# EAGLE board alcoholdetection v1 (EAGLE 9.7.0)
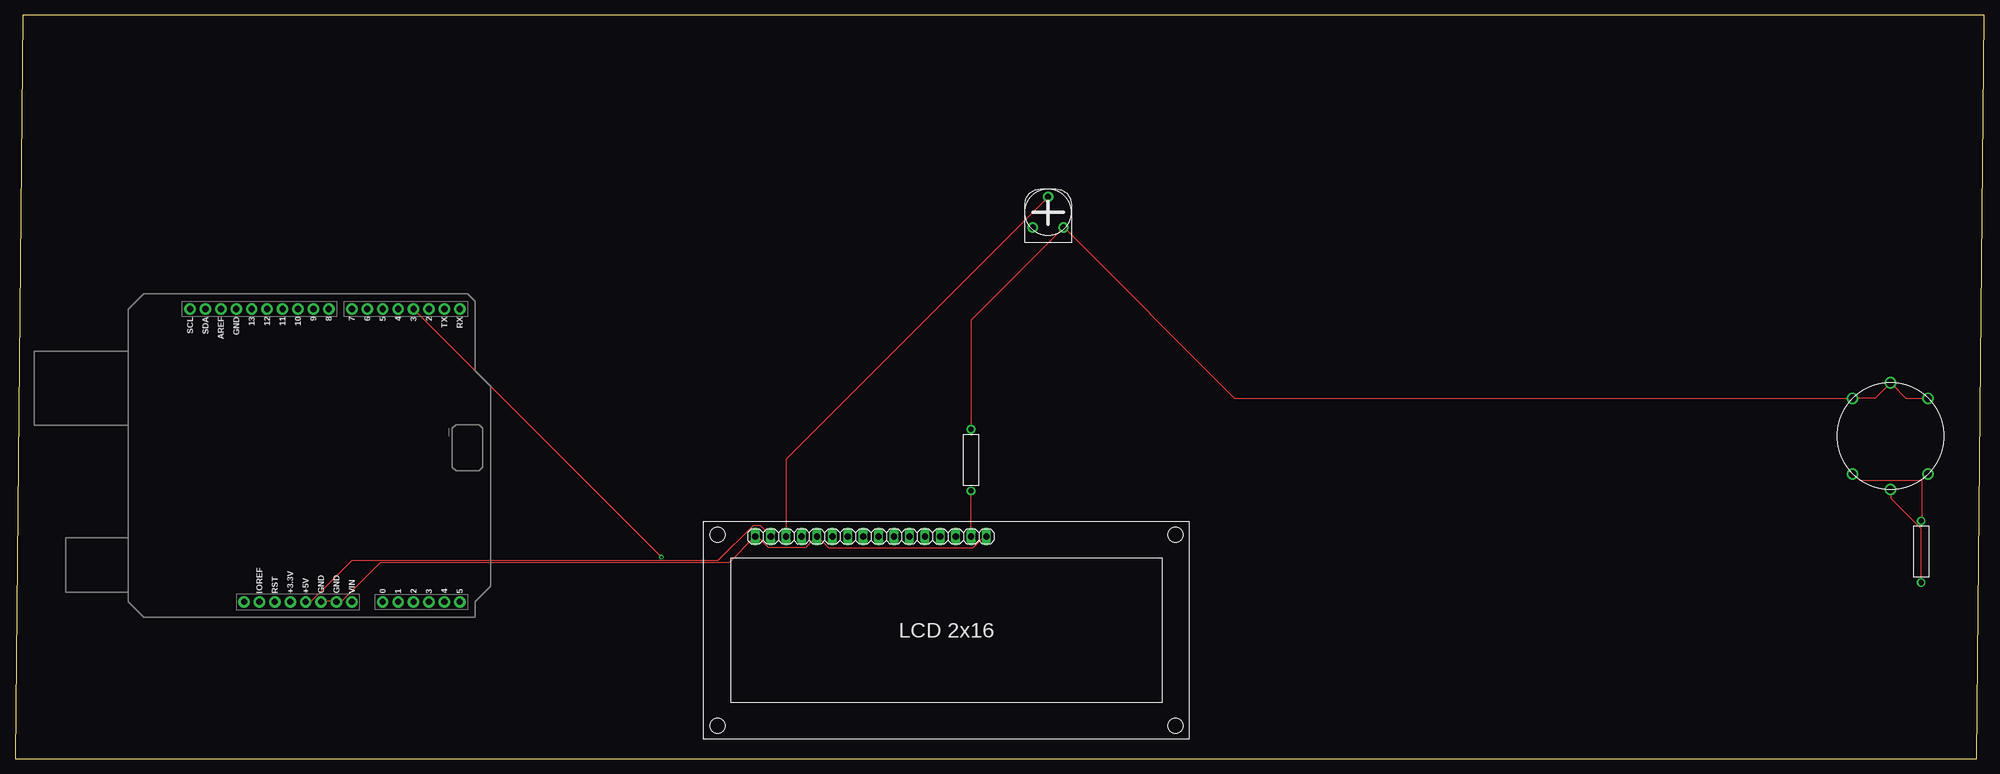
[diagram p0: board, top side]
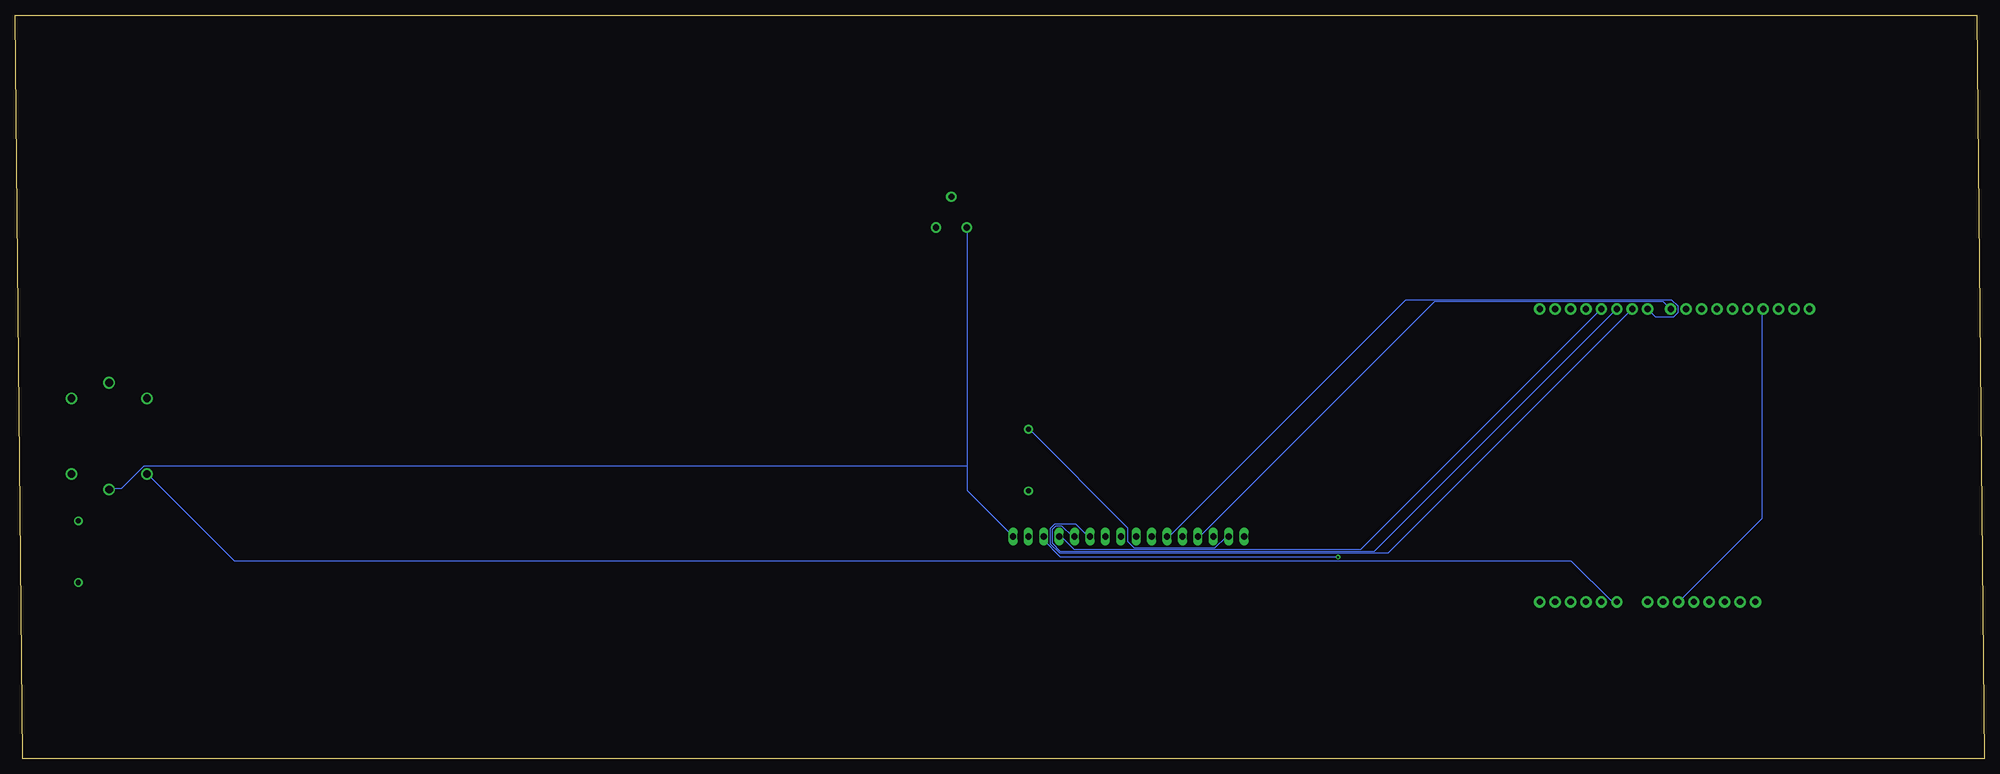
[diagram p1: board, bottom side, seen from below]

Size 324.6 x 122.53 mm. Coordinates in mm from the lower left corner, seen from the top.
Outline: 0,0 323.33,0 324.6,122.53 1.27,122.53 0,0
Copper layers (1*16): Top / Bottom
Stack-up Default Layer Stack: Top User Defined 0.035mm / Dielectric-1 User Defined 1.5mm / Bottom User Defined 0.035mm
Design rules "default": minimum track width 6mil, minimum drill 0.35mm, track to track 6mil, track to pad 6mil, pad to pad 6mil, via to via 6mil, smd to smd 6mil, copper to edge 40mil, drill to drill 6mil, minimum pad ring 10mil, minimum via ring 8mil, stop-mask expansion 4mil, vias tented up to drill 0mil, thermal gap 10mil

## Footprints (pad centres in the part's own frame; a part is rotated, then mirrored left to right if it is on the bottom)
MQ-XX-SOCKET = drill 1.27: 1 -6.223,6.223; 2 -8.788,0; 3 -6.223,-6.223; 4 6.223,-6.223; 5 8.788,0; 6 6.223,6.223
RESAD1016W63L850D250B = drill 0.83 pad 1.43: 1 -5.08,0; 2 5.08,0
HA-06-SM065 = drill 1 pad 1.676: 1 -2.54,-2.54; 2 0,2.54; 3 2.54,-2.54
ARDUINO-UNO-R3-SHIELD = drill 1.016 pad 1.88: 3.3V 24.13,-2.54; 5V 24.13,0; A0 24.13,12.7; A1 24.13,15.24; A2 24.13,17.78; A3 24.13,20.32; A4 24.13,22.86; A5 24.13,25.4; AREF -24.13,-13.97; D2 -24.13,20.32; D3 -24.13,17.78; D4 -24.13,15.24; D5 -24.13,12.7; D6 -24.13,10.16; D7 -24.13,7.62; D8 -24.13,3.81; D9 -24.13,1.27; D10 -24.13,-1.27; D11 -24.13,-3.81; D12 -24.13,-6.35; D13 -24.13,-8.89; GND@0 24.13,2.54; GND@1 24.13,5.08; GND@2 -24.13,-11.43; IOREF 24.13,-7.62; NC 24.13,-10.16; RES 24.13,-5.08; RX -24.13,25.4; SCL -24.13,-19.05; SDA -24.13,-16.51; TX -24.13,22.86; VIN 24.13,7.62
JHD-162A = drill 1.016 long: 1 -19.05,0; 2 -16.51,0; 3 -13.97,0; 4 -11.43,0; 5 -8.89,0; 6 -6.35,0; 7 -3.81,0; 8 -1.27,0; 9 1.27,0; 10 3.81,0; 11 6.35,0; 12 8.89,0; 13 11.43,0; 14 13.97,0; 15 16.51,0; 16 19.05,0

## Placement (x,y rotation side)
GAS1  GAS-SENSORMQ-XX-SOCKET  [MQ-XX-SOCKET]  309.11,53.16 270 top
R1  330  [RESAD1016W63L850D250B]  157.58,49.2 90 top
R2  4.7k  [RESAD1016W63L850D250B]  314.19,34.11 90 top
RPOT1  250k  [HA-06-SM065]  170.28,90.08 0 top
U1  ARDUINO-UNO-R3-SHIELD  [ARDUINO-UNO-R3-SHIELD]  47.88,49.97 270 top
U2  LCD-16X2JHD-162A  [JHD-162A]  141.07,36.63 0 top

## Library data of the parts
GAS1 R1 R2 RPOT1 U1 U2 = Tinkercad

## Nets
U1_5V: GAS1.1 GAS1.2 GAS1.3 R1.2 RPOT1.3 U1.5V U2.2
U1_A0: GAS1.4 GAS1.6 R2.2 U1.A0
U1_D3: U1.D3 U2.14
U1_D4: U1.D4 U2.13
U1_D5: U1.D5 U2.12
U1_D6: U1.D6 U2.11
U1_D7: U1.D7 U2.6
U1_D8: U1.D8 U2.4
U1_GND: GAS1.5 R2.1 RPOT1.1 U1.GND@0 U1.GND@1 U1.GND@2 U2.1 U2.5 U2.16
U2_LED+: R1.1 U2.15
U2_VO: RPOT1.2 U2.3

## Tracks (layer width: path | path; a pad name or v marks a point on that pad's centre or on a via)
U1_5V
  Top 0.152: GAS1.1 315.32,59.44 311.66,59.44 309.22,61.87 GAS1.2 309.07,61.87 306.63,59.44 302.97,59.44 GAS1.3 302.82,59.44 201.02,59.44 172.97,87.48 RPOT1.3 172.82,87.48 157.58,72.24 157.58,54.41 R1.2 | U1.5V 48.01,25.91 48.77,25.91 55.47,32.61 115.82,32.61 121.61,38.41 122.83,38.41 124.51,36.73 U2.2
  Bottom 0.152: U2.2 124.66,36.58 124.97,36.58 126.8,34.75 140.21,34.75 141.28,35.81 141.28,38.1 157.43,54.25 R1.2
U1_A0
  Top 0.152: 314.25,45.87 314.25,39.32 R2.2 | 314.25,45.87 315.32,46.94 GAS1.6 | 314.25,45.87 304.04,45.87 302.97,46.94 GAS1.4
  Bottom 0.152: U1.A0 60.66,25.91 61.42,25.91 68.12,32.61 288.49,32.61 302.82,46.94 GAS1.4
U1_D3  (via drill 0.35)
  Top 0.152: v106.53,33.22 65.68,74.07 U1.D3
  Bottom 0.152: v106.53,33.22 152.25,33.22 154.99,35.97 154.99,36.58 U2.14
U1_D4
  Bottom 0.152: U2.13 152.4,36.58 152.09,36.58 149.96,34.44 102.87,34.44 63.25,74.07 U1.D4
U1_D5
  Bottom 0.152: U2.12 149.96,36.73 150.42,36.73 152.09,38.41 153.01,38.41 153.62,37.8 153.62,35.51 152.25,34.14 100.58,34.14 60.66,74.07 U1.D5
U1_D6
  Bottom 0.152: U2.11 147.52,36.73 147.83,36.73 149.81,38.71 153.16,38.71 153.92,37.95 153.92,35.36 152.4,33.83 98.3,33.83 58.06,74.07 U1.D6
U1_D7
  Bottom 0.152: U2.6 134.57,36.73 134.26,36.73 95.4,75.59 51.51,75.59 50.44,74.52 50.44,73.61 51.21,72.85 54.25,72.85 55.47,74.07 U1.D7
U1_D8
  Bottom 0.152: U2.4 129.54,36.73 129.24,36.73 90.68,75.29 52.88,75.29 51.82,74.22 U1.D8
U1_GND
  Top 0.152: U1.GND@0 50.44,25.91 52.88,25.91 U1.GND@1 53.03,25.91 53.8,25.91 60.2,32.31 117.65,32.31 121.92,36.58 U2.1 122.07,36.58 122.38,36.58 124.21,34.75 130.3,34.75 132.13,36.58 U2.5 132.28,36.58 134.11,34.75 157.89,34.75 159.72,36.58 160.02,36.58 U2.16 | R2.1 314.1,29.11 314.1,37.95 309.22,42.82 309.22,44.35 GAS1.5
  Bottom 0.152: U1.GND@2 36.58,74.07 36.58,39.62 50.29,25.91 U1.GND@0 | 167.64,48.16 167.64,44.2 160.17,36.73 U2.16 | 167.64,48.16 167.64,87.48 RPOT1.1 | 167.64,48.16 303.43,48.16 307.09,44.5 309.07,44.5 GAS1.5
U2_LED+
  Top 0.152: R1.1 157.58,44.04 157.58,36.73 U2.15
U2_VO
  Top 0.152: U2.3 127.1,36.73 127.1,49.38 170.23,92.51 RPOT1.2